# Altium PCB EXP_V121.PcbDoc (part 4 of 4)
Units mm, origin at the board's own origin, x right, y up, seen from the top; angles counter-clockwise.
Board outline 86 x 86 mm, 4 copper layers (Top Layer, Mid-Layer 1, Mid-Layer 2, Bottom Layer), stack 1.584 mm thick; 360 components, 295 nets, 1231 pads, 1192 vias.
Unrouted connection lines stored in the file: 255.
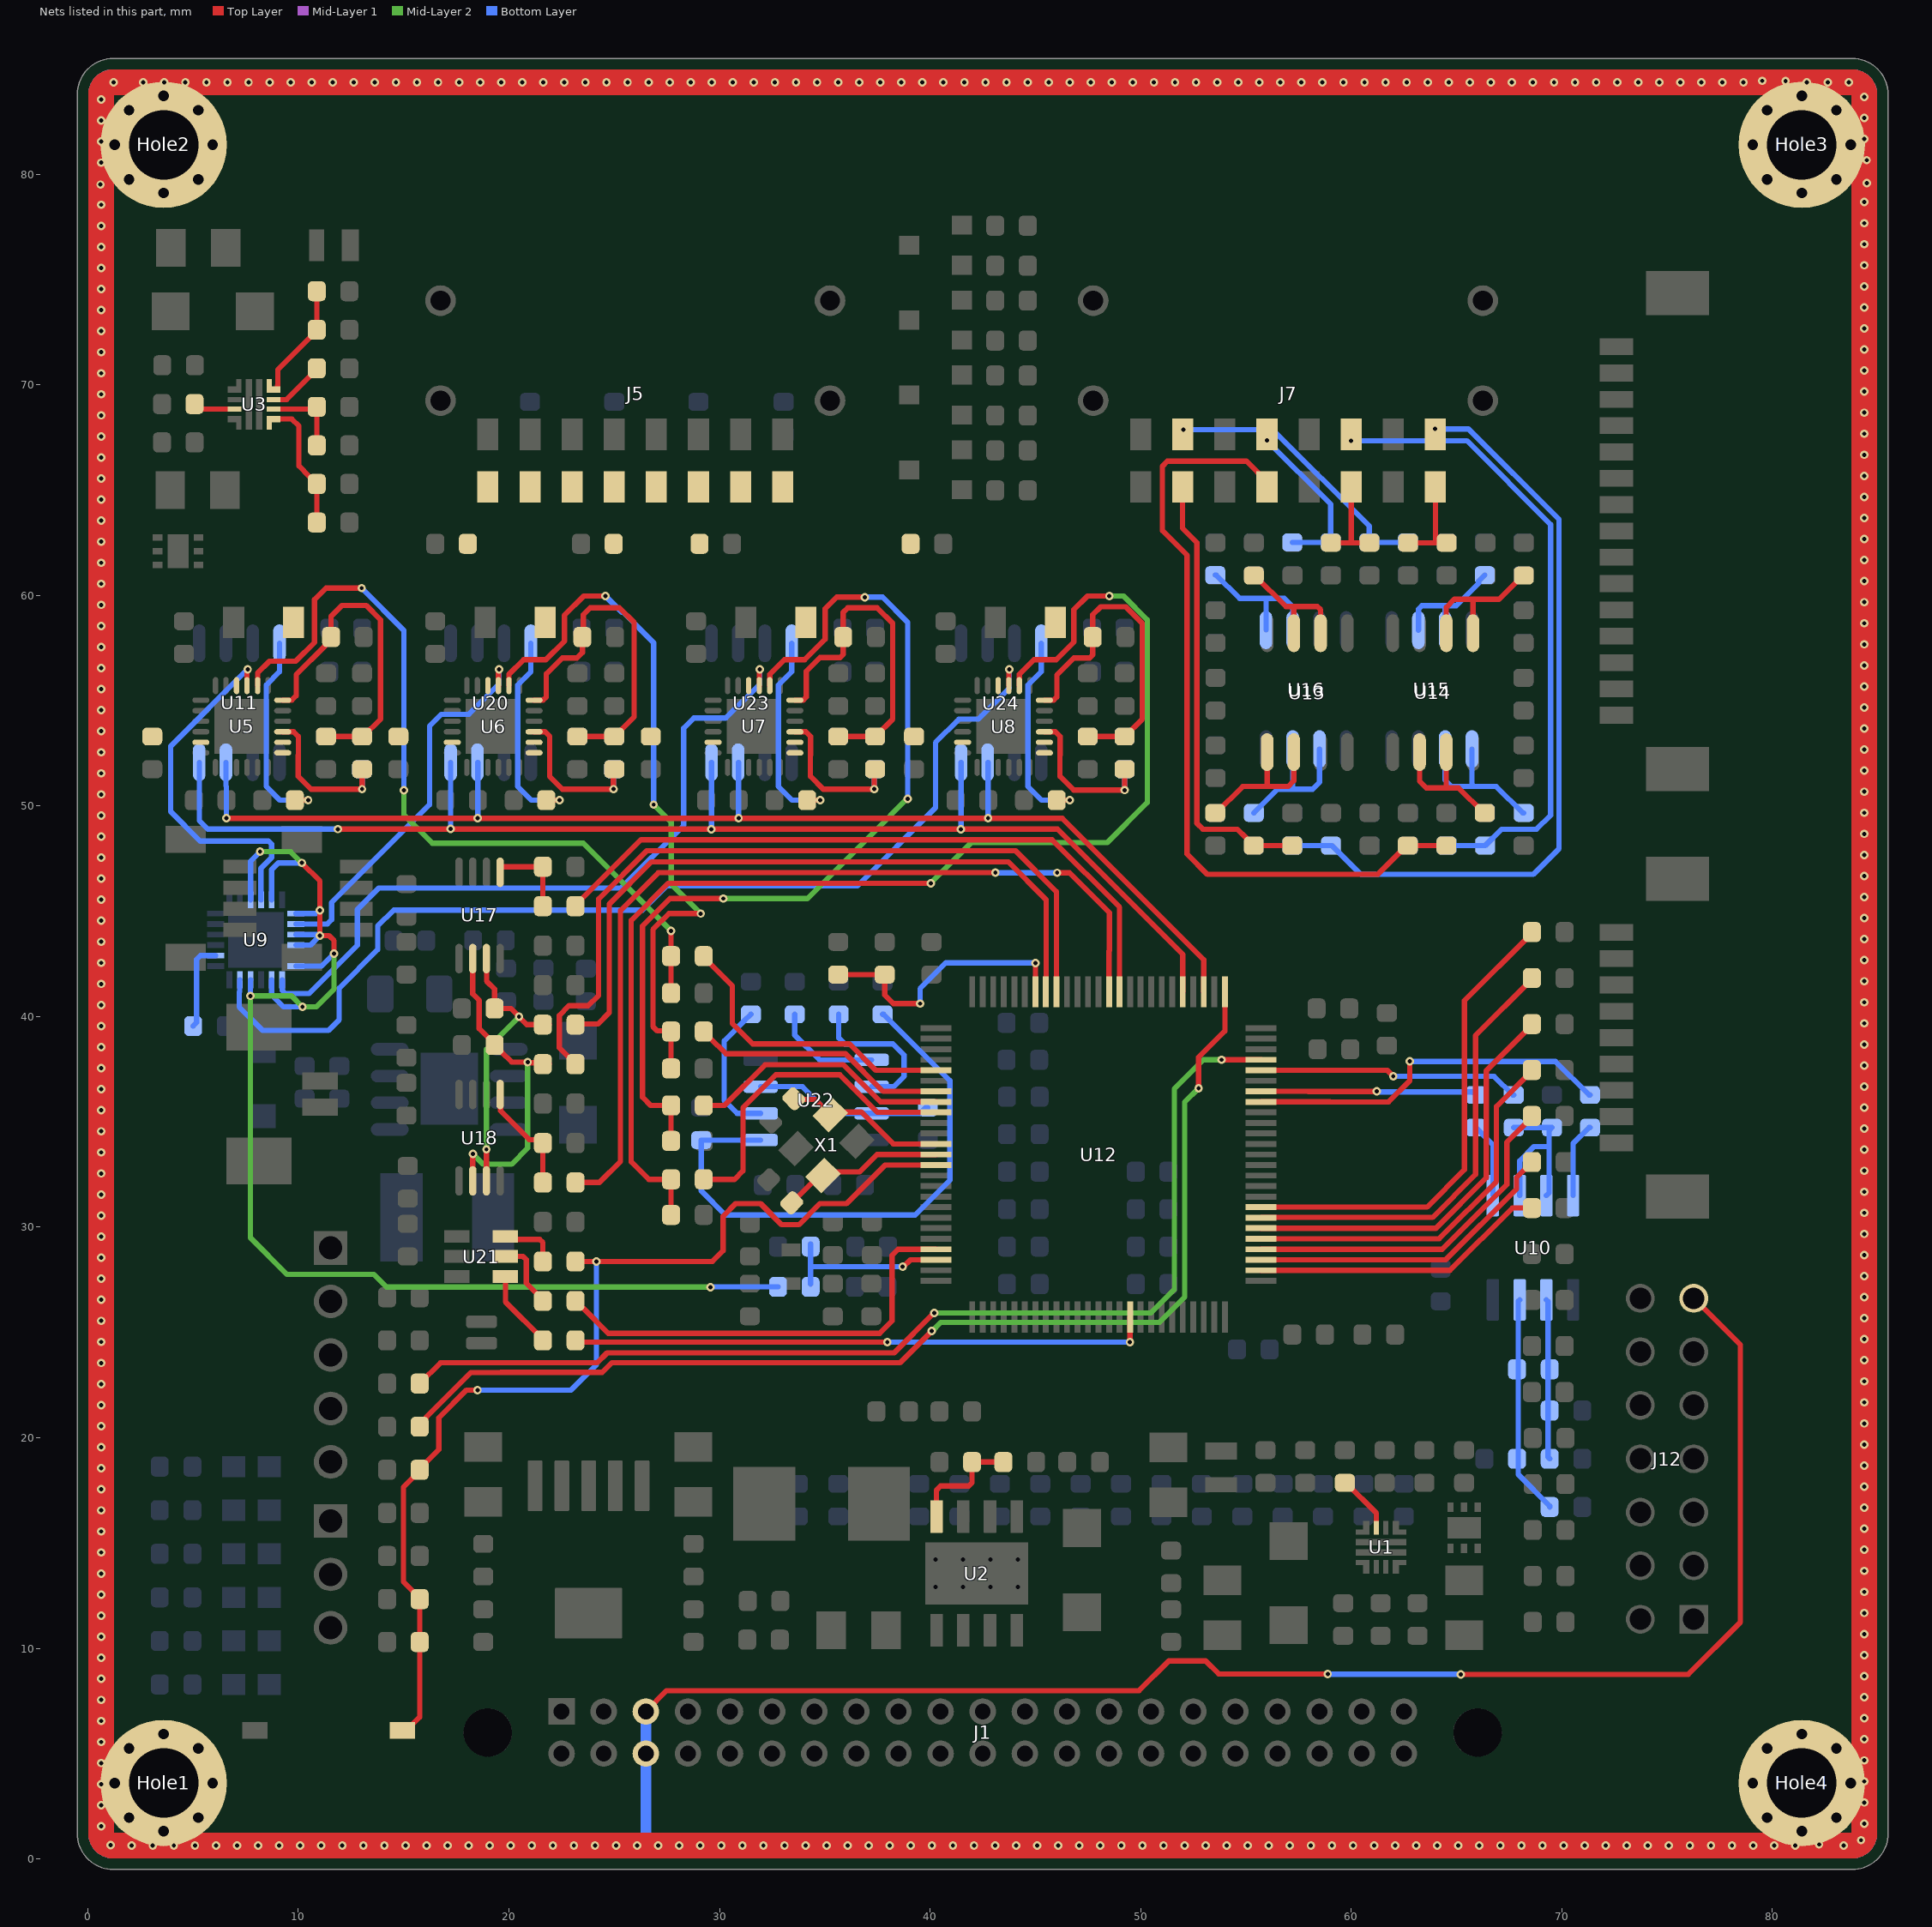
[diagram p6: the nets of this part, all layers, seen from the top]

## Via types
v1: diameter 0.4, hole 0.2, Top Layer to Bottom Layer, tented both sides, 1192 vias

## Nets (pads, with @x,y where several pads share a name; then routed paths per layer and width w, separated by ;. In a path a pad name is that pad's centre, name@x,y a point inside that pad or via, vN(x,y) a via of type N, cw(c..) or ccw(c..) an arc to the next point about the centre after c; other vN are vias at no path point) (continued)
NetR9_2: R9.2 R11.1 U2.4 | length 5.6
  Top Layer w0.254: U2.4@40.307,16.258 40.3,16.265 40.3,17.509 40.499,17.707 41.84,17.707 41.988,17.856 R11.1@41.988,18.836 ; R11.1@41.998,18.846 R9.2@43.483,18.846
NetR12_2: R12.2 R18.1 U3.2 | length 3.9
  Top Layer w0.254: U3.2@8.817,68.852 8.819,68.854 10.772,68.854 R12.2@10.873,68.954 R18.1@10.873,67.124
NetR13_2: R13.2 R17.1 U3.1 | length 6.3
  Top Layer w0.254: U3.1@8.817,68.376 9.693,68.376 10.024,68.046 10.024,66.142 10.525,65.641 10.528,65.641 10.873,65.297 R13.2@10.873,65.293 R17.1@10.873,63.463
NetR14_2: R14.2 R15.1 U3.4 | length 5.6
  Top Layer w0.254: U3.4@8.82,69.776 8.995,69.776 9.018,69.799 9.018,69.974 9.021,69.978 9.021,70.714 10.873,72.565 R14.2@10.873,72.615 R15.1@10.873,74.445
NetR19_1: R19.1 U3.9 | length 2
  Top Layer w0.254: R19.1@5.07,69.087 5.306,68.852 U3.9@6.97,68.852
NetR25_2: R25.2 R29.1 U5.8 | length 37.9
  Top Layer w0.254: U5.8@8.062,55.718 8.062,56.312 8.625,56.875 9.875,56.875 10.77,57.77 10.77,59.804 11.312,60.347 v1(13.005,60.347) ; R29.1@27.7,41.116 R25.2@27.7,42.87 v1(27.7,44.067)
  Mid-Layer 2 w0.254: v1(15.011,50.749) 15.011,49.581 16.358,48.235 23.533,48.235 v1(27.7,44.067)
  Bottom Layer w0.254: v1(13.005,60.347) 15.011,58.34 v1(15.011,50.749)
NetR26_2: R26.2 R30.1 U6.8 | length 34.3
  Top Layer w0.254: U6.8@20,55.718 20,56.25 20.695,56.945 21.75,56.945 22.637,57.832 22.637,59.056 23.552,59.971 v1(24.582,59.971) ; R30.1@27.7,37.536 R26.2@27.7,39.291 27.668,39.323 27.043,39.323 26.839,39.526 26.839,44.13 27.599,44.89 v1(29.108,44.89)
  Mid-Layer 2 w0.254: v1(26.873,50.063) 27.711,49.225 27.711,46.287 v1(29.108,44.89)
  Bottom Layer w0.254: v1(24.582,59.971) 25.354,59.199 25.427,59.199 26.873,57.752 v1(26.873,50.063)
NetR38_2: R38.2 R46.1 U12.94 | length 13.1
  Top Layer w0.254: R46.1@35.636,41.995 R38.2@37.847,41.995 37.847,41.02 38.252,40.615 v1(39.522,40.615) ; U12.94@45,41.172 v1(45,42.546)
  Bottom Layer w0.254: v1(39.522,40.615) 39.522,41.322 40.746,42.546 v1(45,42.546)
NetR66_1: R66.1 U13.1 U13.2 | length 7.4
  Top Layer w0.254: R66.1@53.542,49.67 53.592,49.67 54.849,50.927 55.987,50.927 ; U13.1@56.007,52.556 56.007,50.947 55.987,50.927 ; U13.2@57.277,52.556 57.277,51.197 57.007,50.927 55.987,50.927
NetR67_1: R67.1 U13.6 U13.7 | length 6.2
  Top Layer w0.254: R67.1@55.374,60.947 55.424,60.947 56.899,59.472 58.398,59.472 58.547,59.323 U13.6@58.547,58.206 ; U13.7@57.277,58.206 57.277,59.471
NetR72_1: R72.1 U14.6 U14.7 | length 6.8
  Top Layer w0.254: U14.6@63.246,52.557 63.246,51.181 63.564,50.863 64.516,50.863 65.102,50.863 66.294,49.67 R72.1@66.344,49.67 ; 64.516,50.863 U14.7@64.516,52.557
NetR73_1: R73.1 U14.1 U14.2 | length 7.1
  Top Layer w0.254: U14.2@64.516,58.207 64.516,59.436 64.897,59.817 65.786,59.817 ; U14.1@65.786,58.207 65.786,59.817 ; R73.1@68.198,60.947 68.148,60.947 67.018,59.817 65.786,59.817
NetR78_1: R78.1 U15.6 U15.7 | length 6
  Bottom Layer w0.254: U15.6@63.193,58.353 63.2,58.36 63.2,59.351 63.357,59.508 64.463,59.508 ; U15.7@64.463,58.353 64.463,59.508 ; R78.1@66.345,60.967 66.341,60.967 66.049,60.675 66.049,60.57 65.089,59.611 64.987,59.508 64.463,59.508
NetR80_1: R80.1 U15.1 U15.2 | length 7.7
  Bottom Layer w0.254: U15.2@64.463,52.703 64.463,51.234 64.77,50.927 65.831,50.927 ; U15.1@65.733,52.703 65.733,51.024 65.831,50.927 ; R80.1@68.198,49.67 68.148,49.67 66.891,50.927 65.831,50.927
NetR84_1: R84.1 U16.1 U16.2 | length 6.9
  Bottom Layer w0.254: R84.1@53.542,60.967 53.592,60.967 54.684,59.875 ; 54.702,59.857 55.961,59.857 56.828,59.857 57.22,59.465 U16.2@57.22,58.358 ; U16.1@55.961,58.36 55.961,59.832
NetR85_1: R85.1 U16.6 U16.7 | length 7.2
  Bottom Layer w0.254: R85.1@55.374,49.67 55.378,49.67 56.508,50.8 57.21,50.8 ; U16.7@57.224,52.703 57.224,50.814 57.21,50.8 ; U16.6@58.494,52.703 58.494,51.128 58.166,50.8 57.21,50.8
NetR90_2: R90.2 R95.2 U17.3 U18.3 | length 13.9
  Top Layer w0.254: U18.3@18.931,32.2 v1(18.931,33.693) ; U17.3@18.939,42.744 18.939,41.686 19.317,41.308 R90.2@19.317,40.386 20.089,40.386 20.477,39.998 v1(20.477,39.989) 20.848,39.618 R95.2@21.913,39.618
  Mid-Layer 2 w0.254: v1(18.931,33.693) 18.931,38.443 v1(20.477,39.989)
NetR91_2: R91.2 R94.2 U17.2 U18.2 | length 16.2
  Top Layer w0.254: U18.2@18.281,32.2 18.281,33.47 v1(18.288,33.477) ; U17.2@18.281,42.752 18.281,41.079 18.587,40.773 18.587,39.429 19.317,38.699 19.317,38.646 19.661,38.301 19.665,38.301 20.128,37.838 v1(20.889,37.838) ; v1@20.906,37.855 20.951,37.811 21.431,37.811 21.45,37.791 21.658,37.998 R94.2@21.913,37.744
  Mid-Layer 2 w0.254: v1(18.288,33.477) 18.777,32.988 20.125,32.988 20.889,33.752 v1(20.889,37.838)
NetR96_2: R96.2 R98.1 U17.5 | length 4.1
  Top Layer w0.254: U17.5@19.581,46.852 19.581,47.072 19.625,47.116 R98.1@21.613,47.116 R96.2@21.613,45.242
NetR97_2: R97.2 R101.1 U18.5 | length 5.3
  Top Layer w0.254: U18.5@19.581,36.3 19.599,36.282 19.599,35.523 20.967,34.155 21.453,34.155 R101.1@21.613,33.995 R97.2@21.613,32.12
NetR105_1: R105.1 U21.6 | length 2.8
  Top Layer w0.254: U21.6@19.832,29.559 19.975,29.415 21.464,29.415 21.613,29.266 R105.1@21.613,28.371
NetR106_1: R106.1 U21.5 | length 3.3
  Top Layer w0.254: U21.5@19.832,28.609 19.835,28.612 20.664,28.612 20.82,28.456 20.82,27.344 21.613,26.551 R106.1@21.613,26.497
NetR107_1: R107.1 U21.4 | length 3.8
  Top Layer w0.254: U21.4@19.832,27.659 19.832,26.454 21.613,24.672 R107.1@21.613,24.622
NetR118_2: R118.2 R138.1 U7.8 | length 44.8
  Top Layer w0.254: R138.1@27.7,34.095 R118.2@27.7,35.78 26.729,35.78 26.34,36.169 26.34,44.298 27.647,45.605 v1(30.175,45.605) ; U7.8@32.387,55.718 32.387,56.25 33.082,56.945 34.048,56.945 35.021,57.918 35.021,59.374 35.562,59.916 v1(36.9,59.916)
  Mid-Layer 2 w0.254: v1(30.175,45.605) 34.175,45.605 37.293,48.723 38.914,50.344 v1(38.937,50.344)
  Bottom Layer w0.254: v1(36.9,59.916) 37.747,59.916 38.937,58.726 v1(38.937,50.344)
NetR119_2: R119.2 R145.1 U8.8 | length 60.4
  Top Layer w0.254: R145.1@27.7,30.583 R119.2@27.7,32.269 26.64,32.269 25.806,33.102 25.806,44.574 27.562,46.33 v1(40.03,46.33) ; U8.8@44.238,55.718 44.238,56.25 44.933,56.945 45.988,56.945 46.83,57.787 46.83,59.327 47.469,59.966 v1(48.514,59.966)
  Mid-Layer 2 w0.254: v1(40.03,46.33) 41.962,48.261 48.414,48.261 50.317,50.165 50.317,58.849 49.2,59.966 v1(48.514,59.966)
NetR135_2: R135.2 U1.3 | length 2.8
  Top Layer w0.254: R135.2@59.701,17.859 59.751,17.859 61.196,16.415 U1.3@61.196,15.722
NetR139_2: R139.2 R141.2 U22.1 | length 27.4
  Bottom Layer w0.254: U22.1@31.952,34.132 R139.2@29.13,34.132 29.13,31.729 30.277,30.582 39.294,30.582 40.945,32.233 40.945,36.956 37.794,40.107 R141.2@37.744,40.107
NetR140_2: R140.2 U22.3 U22.7 | length 8.6
  Bottom Layer w0.254: U22.3@31.952,36.672 33.938,36.672 35.208,35.402 U22.7@37.222,35.402 39.519,35.402 39.799,35.682 R140.2@39.896,35.682
NetR142_2: R142.2 U22.6 | length 7.3
  Bottom Layer w0.254: R142.2@35.66,40.107 35.66,38.987 35.946,38.701 38.237,38.701 38.76,38.177 38.76,37.161 38.274,36.675 37.224,36.675 U22.6@37.222,36.672
NetR143_2: R143.2 U22.5 | length 5.1
  Bottom Layer w0.254: R143.2@33.576,40.107 33.576,39.119 34.752,37.942 U22.5@37.222,37.942
NetR144_2: R144.2 U22.2 | length 6.6
  Bottom Layer w0.254: R144.2@31.492,40.107 31.488,40.107 31.197,39.815 31.197,39.812 30.226,38.841 30.226,36.013 30.836,35.402 U22.2@31.952,35.402
NetR149_2: R149.2 U3.3 | length 2.7
  Top Layer w0.254: U3.3@8.82,69.301 9.439,69.301 10.873,70.734 R149.2@10.873,70.784
NetR153_1: R153.1 U9.20 | length 4.2
  Bottom Layer w0.254: R153.1@5.004,39.55 5.169,39.715 5.169,42.715 5.348,42.895 U9.20@6.075,42.895
NetR154_2: R154.2 U9.3 U9.5 U9.7 U9.9 U9.10 U9.12 U9.14 U9.16 | length 65.5
  Top Layer w0.254: v1(10.16,47.298) 11.024,46.434 v1(11.024,45.041) v1(11.024,43.844) 11.452,43.844 11.695,43.601 v1(11.695,42.991)
  Mid-Layer 2 w0.254: v1(8.179,47.831) 9.627,47.831 v1(10.16,47.298) ; v1(11.695,42.991) 11.695,41.311 10.845,40.462 v1(10.194,40.462) 9.676,40.98 v1(7.722,40.98) 7.722,29.489 9.449,27.762 13.572,27.762 14.182,27.153 v1(29.566,27.153)
  Bottom Layer w0.254: v1(7.722,40.98) 7.724,40.983 7.724,41.74 U9.16@7.727,41.743 ; U9.3@7.727,45.547 7.727,47.379 v1(8.179,47.831) ; U9.14@8.727,41.743 8.727,41.032 9.297,40.462 v1(10.194,40.462) ; U9.5@8.727,45.547 8.727,46.979 9.045,47.298 v1(10.16,47.298) ; U9.12@9.879,42.395 11.098,42.395 v1(11.695,42.991) ; U9.10@9.879,43.395 10.575,43.395 11.009,43.829 10.998,43.829 10.933,43.895 U9.9@9.879,43.895 ; U9.7@9.879,44.895 10.838,44.895 10.984,45.041 v1(11.024,45.041) ; v1(29.566,27.153) 29.578,27.165 R154.2@32.778,27.165
NetR157_1: R157.1 U10.4 | length 3.6
  Bottom Layer w0.254: U10.4@70.54,31.5 70.54,33.974 71.294,34.729 R157.1@71.344,34.729
NetR159_1: R159.1 U10.1 | length 3.6
  Bottom Layer w0.254: R159.1@65.913,34.729 65.917,34.729 66.208,34.437 66.208,34.434 66.73,33.912 U10.1@66.73,31.5
NetR167_1: R167.1 R168.2 U10.2 U10.3 | length 8.5
  Bottom Layer w0.254: R167.1@67.723,34.729 R168.2@69.534,34.729 69.402,34.597 69.402,33.824 ; U10.2@68,31.5 68,33.151 68.673,33.824 69.402,33.824 ; U10.3@69.27,31.5 69.402,31.632 69.402,33.824
NetU5_1: U5.1 U5.2
NetU6_1: U6.1 U6.2
NetU7_1: U7.1 U7.2
NetU8_1: U8.1 U8.2
NRST: BT1.2 C149.2 R105.2 R110.2 R117.1 U12.14 | length 50.6
  Top Layer w0.254: BT1.2@14.93,6.096 15.13,6.096 15.761,6.727 C149.2@15.761,10.299 R110.2@15.761,12.335 15.761,12.385 14.992,13.154 14.992,17.659 15.761,18.428 R117.1@15.761,18.478 15.761,18.528 16.671,19.439 16.671,20.95 17.98,22.259 v1(18.505,22.259) ; R105.2@23.163,28.371 v1(24.157,28.371) 29.659,28.371 30.17,28.882 30.17,30.52 30.766,31.116 31.952,31.116 32.95,30.117 33.766,30.117 34.761,31.113 36.024,31.113 37.862,32.95 U12.14@40.278,32.95
  Bottom Layer w0.254: v1(18.505,22.259) 22.945,22.259 24.157,23.47 v1(24.157,28.371)
NTC1-: J7.2 R68.1 R71.1 | length 21.2
  Top Layer w0.254: J7.2@51.985,65.135 51.985,63.198 52.675,62.509 52.675,49.179 52.956,48.898 54.593,48.898 55.023,48.468 55.023,48.464 55.367,48.12 55.611,48.12 R68.1@57.2,48.12
NTC2-: J7.4 R74.1 R77.1 | length 37.9
  Top Layer w0.254: J7.4@56,65.15 56,65.4 55.026,66.374 51.268,66.374 51.035,66.141 51.035,63.075 52.2,61.91 52.2,47.724 53.169,46.755 61.271,46.755 62.637,48.12 R74.1@62.687,48.12 R77.1@64.516,48.12
NTC3-: J7.6 R69.1 R70.1 | length 4.5
  Top Layer w0.254: R70.1@59.038,62.497 59.954,62.497 ; J7.6@60,65.15 60,62.543 59.954,62.497 ; R69.1@60.87,62.497 59.954,62.497
NTC4-: J7.8 R75.1 R76.1 | length 4
  Top Layer w0.254: R76.1@62.702,62.497 64.012,62.497 64,62.509 J7.8@64,65.15
NTC5-: J7.10 R79.1 R82.1 | length 13.3
  Bottom Layer w0.254: v1@52.045,67.869 56.28,67.869 60.858,63.292 R79.1@60.858,62.517 R82.1@62.687,62.517
  other v1: 52.036,67.879
NTC6-: J7.12 R86.1 R88.1 | length 7.9
  Bottom Layer w0.254: v1(55.994,67.359) 59.022,64.331 R88.1@59.022,62.524 ; R86.1@57.2,62.517 R88.1@59.029,62.517
NTC7-: J7.14 R81.1 R83.1 | length 30.5
  Bottom Layer w0.254: v1(59.996,67.345) 65.493,67.345 69.469,63.37 69.469,49.557 68.807,48.895 67.141,48.895 R83.1@66.366,48.12 R81.1@64.534,48.12
NTC8-: J7.16 R87.1 R89.1 | length 37
  Bottom Layer w0.254: R89.1@57.206,48.12 59.086,48.12 60.451,46.755 68.65,46.755 69.873,47.978 69.873,63.604 65.572,67.905 v1(63.991,67.905)
OSC0: C150.1 U12.12 X1.3 | length 7.7
  Top Layer w0.254: C150.1@33.529,36.097 33.564,36.062 34.549,36.062 X1.3@35.26,35.351 ; X1.3@35.295,35.245 35.752,35.245 35.97,35.462 36.739,35.462 38.252,33.95 U12.12@40.278,33.95
OSC1: C151.2 U12.13 X1.1 | length 7.8
  Top Layer w0.254: C151.2@33.43,31.154 34.834,32.558 34.871,32.558 34.942,32.628 36.659,32.628 37.48,33.45 U12.13@40.278,33.45
PHOTO_ADC_CONV: R133.2 U12.57 | length 21.5
  Top Layer w0.254: U12.57@55.722,30.45 55.734,30.463 63.864,30.463 65.908,32.507 65.908,39.103 68.585,41.78 R133.2@68.585,41.83
PHOTO_ADC_CS: R132.2 U12.56 | length 19.9
  Top Layer w0.254: U12.56@55.722,29.95 64.024,29.95 66.418,32.343 66.418,37.428 68.585,39.595 R132.2@68.585,39.645
PHOTO_ADC_EOC: R134.2 U12.58 | length 23
  Top Layer w0.254: U12.58@55.722,30.95 63.6,30.95 65.38,32.729 65.38,40.759 68.585,43.964 R134.2@68.585,44.014
PHOTO_PD_CS: R131.2 U12.55 | length 18.3
  Top Layer w0.254: U12.55@55.722,29.45 64.178,29.45 66.899,32.172 66.899,35.726 68.585,37.411 R131.2@68.585,37.461
PHOTO_SPI2_MISO: R129.2 U12.53 | length 15.1
  Top Layer w0.254: U12.53@55.722,28.45 64.485,28.45 67.855,31.819 67.855,32.363 68.237,32.745 68.24,32.745 68.585,33.089 R129.2@68.585,33.093
PHOTO_SPI2_MOSI: R130.2 U12.54 | length 16.7
  Top Layer w0.254: U12.54@55.722,28.95 64.318,28.95 67.392,32.024 67.392,34.034 68.585,35.227 R130.2@68.585,35.277
PHOTO_SPI2_SCK: R128.2 U12.52 | length 14.1
  Top Layer w0.254: U12.52@55.722,27.95 64.692,27.95 67.65,30.908 R128.2@68.585,30.908
PROTECT_EMI: Hole1.1 Hole2.1 Hole3.1 Hole4.1 J1.3 J1.24 J12.13 | length 1412.7
  Top Layer w0.254: J1.3@26.5,7 27.487,7.987 49.926,7.987 51.337,9.398 53.089,9.398 53.703,8.784 58.879,8.784 v1(58.884,8.779) ; v1(65.209,8.763) 76.007,8.763 78.486,11.242 78.486,24.404 J12.13@76.27,26.62
  Top Layer w1.23: 0.635,1.2 ccw(c1.2,1.2) v1@1.199,0.635 ; 0.635,1.202 0.635,83.8 ; 0.635,83.801 cw(c1.2,83.8) v1@1.2,84.365 ; v1@1.2,0.635 14.086,0.635 15.086,0.635 20.086,0.635 23.086,0.635 37.086,0.635 42.086,0.635 43.086,0.635 51.086,0.635 56.086,0.635 62.086,0.635 69.086,0.635 70.086,0.635 v1(83.388,0.635) 83.798,0.635 ; v1@1.202,84.365 v1@83.8,84.365 ; 83.8,0.635 ccw(c83.8,1.2) 84.365,1.198 ; v1@83.802,84.365 cw(c83.8,83.8) v1@84.365,83.8 ; 84.365,1.2 v1@84.365,83.797
  Mid-Layer 1 w1.23: 0.635,1.2 ccw(c1.2,1.2) v1@1.199,0.635 ; 0.635,1.202 0.635,83.8 ; 0.635,83.801 cw(c1.2,83.8) v1@1.2,84.365 ; v1@1.2,0.635 14.086,0.635 15.086,0.635 21.086,0.635 22.086,0.635 26.086,0.635 42.086,0.635 43.086,0.635 52.086,0.635 61.086,0.635 63.086,0.635 69.086,0.635 70.086,0.635 v1(83.388,0.635) 83.798,0.635 ; v1@1.202,84.365 v1@83.8,84.365 ; 83.8,0.635 ccw(c83.8,1.2) 84.365,1.198 ; v1@83.802,84.365 cw(c83.8,83.8) v1@84.365,83.8 ; 84.365,1.2 v1@84.365,83.797
  Mid-Layer 2 w1.23: 0.636,1.2 ccw(c1.201,1.2) v1@1.199,0.635 ; 0.636,1.203 0.636,83.8 ; 0.636,83.801 cw(c1.201,83.8) v1@1.201,84.365 ; v1@1.201,0.635 7.086,0.635 14.086,0.635 15.086,0.635 19.086,0.635 28.086,0.635 33.086,0.635 42.086,0.635 43.086,0.635 58.086,0.635 69.086,0.635 70.086,0.635 80.086,0.635 83.798,0.635 ; v1@1.202,84.365 v1@83.801,84.365 ; 83.801,0.635 ccw(c83.801,1.2) 84.366,1.199 ; v1@83.802,84.365 cw(c83.801,83.8) v1@84.366,83.8 ; 84.366,1.2 v1@84.366,83.797
  Bottom Layer w0.254: v1(58.884,8.779) 58.892,8.771 65.201,8.771 v1(65.209,8.763)
  Bottom Layer w0.508: 26.5,0.635 J1.24@26.5,5 J1.3@26.5,7
  Bottom Layer w1.23: 0.636,1.2 ccw(c1.201,1.2) v1@1.199,0.635 ; 0.636,1.203 0.636,83.8 ; 0.636,83.801 cw(c1.201,83.8) v1@1.201,84.365 ; v1@1.201,0.635 6.086,0.635 14.086,0.635 15.086,0.635 20.086,0.635 26.5,0.635 36.086,0.635 42.086,0.635 43.086,0.635 48.086,0.635 55.086,0.635 62.086,0.635 69.086,0.635 70.086,0.635 75.086,0.635 83.798,0.635 ; v1@1.202,84.365 v1@83.801,84.365 ; 83.801,0.635 ccw(c83.801,1.2) 84.366,1.199 ; v1@83.802,84.365 cw(c83.801,83.8) v1@84.366,83.8 ; 84.366,1.2 v1@84.366,83.797
  other v1: 1.086,0.656 2.086,0.638 3.086,0.638 4.086,0.638 5.086,0.638 6.086,0.638 7.086,0.638 8.086,0.638 9.086,0.638 10.086,0.638 11.086,0.638 12.086,0.638 13.086,0.638 14.086,0.638 15.086,0.638 16.086,0.638 17.086,0.638 18.086,0.638 19.086,0.638 20.086,0.638 21.086,0.638 22.086,0.638 23.086,0.638 24.086,0.638 25.086,0.638 26.086,0.638 27.086,0.638 28.086,0.638 29.086,0.638 30.086,0.638 31.086,0.638 32.086,0.638 33.086,0.638 34.086,0.638 35.086,0.638 36.086,0.638 37.086,0.638 38.086,0.638 39.086,0.638 40.086,0.638 41.086,0.638 42.086,0.638 43.086,0.638 44.086,0.638 45.086,0.638 46.086,0.638 47.086,0.638 48.086,0.638 49.086,0.638 50.086,0.638 51.086,0.638 52.086,0.638 53.086,0.638 54.086,0.638 55.086,0.638 56.086,0.638 57.086,0.638 58.086,0.638 59.086,0.638 60.086,0.638 61.086,0.638 62.086,0.638 63.086,0.638 64.086,0.638 65.086,0.638 66.086,0.638 67.086,0.638 68.086,0.638 69.086,0.638 70.086,0.638 71.086,0.638 72.086,0.638 73.086,0.638 74.086,0.638 75.086,0.638 76.086,0.638 77.086,0.638 78.086,0.638 79.086,0.638 80.086,0.638 81.086,0.638 82.22,0.686 84.213,0.888 0.639,1.55 84.362,1.678 0.639,2.55 84.362,2.678 0.639,3.55 84.362,3.678 0.639,4.55 84.362,4.678 0.639,5.55 84.362,5.678 0.639,6.55 84.362,6.678 0.639,7.55 84.362,7.678 0.639,8.55 84.362,8.678 0.639,9.55 84.362,9.678 0.639,10.55 84.362,10.678 0.639,11.55 84.362,11.678 0.639,12.55 84.362,12.678 0.639,13.55 84.362,13.678 0.639,14.55 84.362,14.678 0.639,15.55 84.362,15.678 0.639,16.55 84.362,16.678 0.639,17.55 84.362,17.678 0.639,18.55 84.362,18.678 0.639,19.55 84.362,19.678 0.639,20.55 84.362,20.678 0.639,21.55 84.362,21.678 0.639,22.55 84.362,22.678 0.639,23.55 84.362,23.678 0.639,24.55 84.362,24.678 0.639,25.55 84.362,25.678 0.639,26.55 84.362,26.678 0.639,27.55 84.362,27.678 0.639,28.55 84.362,28.678 0.639,29.55 84.362,29.678 0.639,30.55 84.362,30.678 0.639,31.55 84.362,31.678 0.639,32.55 84.362,32.678 0.639,33.55 84.362,33.678 0.639,34.55 84.362,34.678 0.639,35.55 84.362,35.678 0.639,36.55 84.362,36.678 0.639,37.55 84.362,37.678 0.639,38.55 84.362,38.678 0.639,39.55 84.362,39.678 0.639,40.55 84.362,40.678 0.639,41.55 84.362,41.678 0.639,42.55 84.362,42.678 0.639,43.55 84.362,43.678 0.639,44.55 84.362,44.678 0.639,45.55 84.362,45.678 0.639,46.55 84.362,46.678 0.639,47.55 84.362,47.678 0.639,48.55 84.362,48.678 0.639,49.55 84.362,49.678 0.639,50.55 84.362,50.678 0.639,51.55 84.362,51.678 0.639,52.55 84.362,52.678 0.639,53.55 84.362,53.678 0.639,54.55 84.362,54.678 0.639,55.55 84.362,55.678 0.639,56.55 84.362,56.678 0.639,57.55 84.362,57.678 0.639,58.55 84.362,58.678 0.639,59.55 84.362,59.678 0.639,60.55 84.362,60.678 0.639,61.55 84.362,61.678 0.639,62.55 84.362,62.678 0.639,63.55 84.362,63.678 0.639,64.55 84.362,64.678 0.639,65.55 84.362,65.678 0.639,66.55 84.362,66.678 0.639,67.55 84.362,67.678 0.639,68.55 84.362,68.678 0.639,69.55 84.362,69.678 0.639,70.55 84.362,70.678 0.639,71.55 84.362,71.678 0.639,72.55 84.362,72.678 0.639,73.55 84.362,73.678 0.639,74.55 84.362,74.678 0.639,75.55 84.362,75.678 0.639,76.55 84.362,76.678 0.639,77.55 84.362,77.678 0.639,78.55 84.362,78.678 0.602,79.512 84.482,79.583 0.639,80.55 84.48,80.67 0.639,81.55 84.362,81.678 0.639,82.55 84.362,82.678 0.639,83.55 84.362,83.678 1.223,84.361 2.632,84.361 3.632,84.361 4.632,84.361 5.632,84.361 6.632,84.361 7.632,84.361 8.632,84.361 9.632,84.361 10.632,84.361 11.632,84.361 12.632,84.361 13.632,84.361 14.632,84.361 15.632,84.361 16.632,84.361 17.632,84.361 18.632,84.361 19.632,84.361 20.632,84.361 21.632,84.361 22.632,84.361 23.632,84.361 24.632,84.361 25.632,84.361 26.632,84.361 27.632,84.361 28.632,84.361 29.632,84.361 30.632,84.361 31.632,84.361 32.632,84.361 33.632,84.361 34.632,84.361 35.632,84.361 36.632,84.361 37.632,84.361 38.632,84.361 39.632,84.361 40.632,84.361 41.632,84.361 42.632,84.361 43.632,84.361 44.632,84.361 45.632,84.361 46.632,84.361 47.632,84.361 48.632,84.361 49.632,84.361 50.632,84.361 51.632,84.361 52.632,84.361 53.632,84.361 54.632,84.361 55.632,84.361 56.632,84.361 57.632,84.361 58.632,84.361 59.632,84.361 60.632,84.361 61.632,84.361 62.632,84.361 63.632,84.361 64.632,84.361 65.632,84.361 66.632,84.361 67.632,84.361 68.632,84.361 69.632,84.361 70.632,84.361 71.632,84.361 72.632,84.361 73.632,84.361 74.632,84.361 75.632,84.361 76.632,84.361 77.632,84.361 78.632,84.361 81.632,84.361 82.632,84.361 83.632,84.361 80.628,84.422 79.522,84.437
RS485_A: R156.2 R158.1 R161.2 U10.6 | length 7.6
  Bottom Layer w0.254: U10.6@69.27,26.55 69.349,26.471 69.349,19.079 R161.2@69.427,19
RS485_B: R158.2 R160.1 R162.2 U10.7 | length 10.5
  Bottom Layer w0.254: U10.7@68,26.55 67.939,26.489 67.939,23.25 67.939,18.249 69.427,16.76 R162.2@69.427,16.71
RS485_USART1_DE: R167.2 U12.71 | length 12.6
  Top Layer w0.254: U12.71@55.722,37.45 61.709,37.45 v1@62.046,37.113
  Bottom Layer w0.254: v1(61.998,37.161) 66.792,37.161 67.673,36.279 R167.2@67.723,36.279
RS485_USART1_RX: R159.2 U12.69 | length 10.3
  Top Layer w0.254: U12.69@55.722,36.45 57.958,36.45 57.968,36.44 61.205,36.44 v1(61.215,36.45)
  Bottom Layer w0.254: v1(61.215,36.45) 61.243,36.422 65.77,36.422 R159.2@65.913,36.279
RS485_USART1_TX: R157.2 U12.68 | length 17.6
  Top Layer w0.254: U12.68@55.722,35.95 58.988,35.95 58.993,35.945 61.771,35.945 62.781,36.955 v1(62.781,37.871)
  Bottom Layer w0.254: v1(62.781,37.871) 69.702,37.871 71.294,36.279 R157.2@71.344,36.279
SENSOR1_EN: R96.1 U12.86 | length 32.5
  Top Layer w0.254: R96.1@23.163,45.242 23.163,45.292 26.266,48.395 45.795,48.395 49,45.19 49,44.343 48.995,44.338 48.995,43.92 49,43.915 U12.86@49,41.172
SENSOR2_EN: R97.1 U12.87 | length 43
  Top Layer w0.254: R97.1@23.163,32.12 24.297,32.12 25.298,33.122 25.298,45.034 27.099,46.835 v1(43.101,46.835) ; v1(46.033,46.83) 46.628,46.83 48.52,44.938 48.52,43.129 48.5,43.109 U12.87@48.5,41.172
  Bottom Layer w0.254: v1(43.101,46.835) 43.106,46.83 v1(46.033,46.83)
SENSOR_I2C1_SCL: R94.1 U12.92 | length 37.7
  Top Layer w0.254: R94.1@23.163,37.744 23.163,37.747 22.819,38.092 22.815,38.092 22.391,38.516 22.391,40.053 22.848,40.51 23.761,40.51 24.257,41.006 24.257,45.593 26.539,47.875 44.061,47.875 46,45.936 U12.92@46,41.172
SENSOR_I2C1_SDA: R95.1 U12.93 | length 33.7
  Top Layer w0.254: R95.1@23.163,39.618 23.189,39.644 24.226,39.644 24.765,40.183 24.765,45.339 26.776,47.35 43.716,47.35 45.513,45.554 U12.93@45.513,41.184
SWCLK: R116.1 U12.76 | length 54.2
  Top Layer w0.254: R116.1@15.761,20.526 15.761,20.623 16.059,20.921 16.059,20.961 18.197,23.099 19.614,23.099 19.618,23.102 24.428,23.102 24.884,23.558 38.569,23.558 v1(40.081,25.07) ; v1(52.754,36.595) 52.754,38.071 54,39.317 U12.76@54,41.172
  Mid-Layer 2 w0.254: v1(40.081,25.07) 40.1,25.07 40.501,25.471 50.886,25.471 52.088,26.674 52.088,35.929 v1(52.754,36.595)
SWDIO: R115.1 U12.72 | length 51.9
  Top Layer w0.254: R115.1@15.761,22.574 16.745,23.559 24.189,23.559 24.662,24.031 38.298,24.031 v1(40.196,25.928) ; v1(53.848,37.95) U12.72@55.722,37.95
  Mid-Layer 2 w0.254: v1(40.196,25.928) 50.493,25.928 51.598,27.033 51.598,36.568 52.98,37.95 v1(53.848,37.95)
TEC1_CONTROL_VOLT: R33.1 U11.8 | length 9.9
  Top Layer w0.254: R33.1@9.837,50.275 v1(10.462,50.275)
  Bottom Layer w0.254: U11.8@9.102,57.725 9.102,56.376 8.476,55.75 8.476,50.925 9.126,50.275 v1(10.462,50.275)
TEC1_VREF_2.5: C26.2 R23.1 R31.1 U5.6 | length 15.7
  Top Layer w0.254: U5.6@9.255,55.025 9.681,55.025 9.896,55.24 9.896,56.233 11.252,57.589 11.252,57.631 11.55,57.929 11.55,59.013 12.061,59.524 13.222,59.524 13.9,58.846 13.9,54.125 13.075,53.3 R31.1@13.025,53.3 R23.1@11.312,53.3
TEC2_CONTROL_VOLT: R34.1 U20.8 | length 9.9
  Top Layer w0.254: R34.1@21.775,50.275 v1(22.4,50.275)
  Bottom Layer w0.254: U20.8@21.04,57.725 21.04,56.376 20.414,55.75 20.414,50.925 21.064,50.275 v1(22.4,50.275)
TEC2_VREF_2.5: C27.2 R24.1 R32.1 U6.6 | length 16.1
  Top Layer w0.254: U6.6@21.193,55.025 21.626,55.025 21.775,55.174 21.775,56.275 22.53,57.03 23.23,57.03 23.487,57.287 C27.2@23.487,58.025 23.532,58.07 23.532,59.089 23.854,59.411 25.248,59.411 25.95,58.708 25.95,54.237 25.013,53.3 24.963,53.3 R24.1@23.25,53.3
TEC3_CONTROL_VOLT: R148.1 U23.8 | length 9.9
  Top Layer w0.254: R148.1@34.162,50.275 v1(34.787,50.275)
  Bottom Layer w0.254: U23.8@33.427,57.725 33.427,56.376 32.801,55.75 32.801,50.925 33.451,50.275 v1(34.787,50.275)
TEC3_VREF_2.5: C38.2 R56.1 R146.1 U7.6 | length 16.1
  Top Layer w0.254: U7.6@33.58,55.025 33.976,55.025 34.125,55.174 34.125,56.4 34.775,57.05 35.726,57.05 35.874,57.199 35.874,59.196 36.088,59.411 37.489,59.411 38.225,58.675 38.225,54.125 37.4,53.3 37.35,53.3 R56.1@35.637,53.3
TEC4_CONTROL_VOLT: R150.1 U24.8 | length 9.9
  Top Layer w0.254: R150.1@46.013,50.275 v1(46.638,50.275)
  Bottom Layer w0.254: U24.8@45.278,57.725 45.278,56.376 44.651,55.75 44.651,50.925 45.302,50.275 v1(46.638,50.275)
TEC4_VREF_2.5: C39.2 R57.1 R147.1 U8.6 | length 16
  Top Layer w0.254: U8.6@45.431,55.025 45.87,55.025 46.019,55.174 46.019,56.219 46.83,57.03 47.576,57.03 47.725,57.179 C39.2@47.725,58.025 47.725,59.083 48.103,59.461 49.289,59.461 50.075,58.675 50.075,54.125 49.25,53.3 49.2,53.3 R57.1@47.488,53.3
TEC_1_A: C28.2 J5.1 U5.17
TEC_1_B: C32.2 J5.2 L2.2 U5.10
TEC_1_EN: R25.1 U12.5 | length 14.4
  Top Layer w0.254: R25.1@29.25,42.87 29.25,42.82 30.603,41.467 30.603,39.677 31.576,38.704 36.173,38.704 37.427,37.45 U12.5@40.336,37.45
TEC_2_A: C29.2 J5.3 U6.17
TEC_2_B: C33.2 J5.4 L3.2 U6.10
TEC_2_EN: R26.1 U12.7 | length 12.2
  Top Layer w0.254: R26.1@29.25,39.291 29.25,39.287 29.541,38.995 29.545,38.995 30.304,38.236 35.985,38.236 37.772,36.45 U12.7@40.278,36.45
TEC_3_A: C40.2 J5.5 U7.17
TEC_3_B: C44.2 J5.6 L4.2 U7.10
TEC_3_EN: R118.1 U12.8 | length 12.6
  Top Layer w0.254: R118.1@29.25,35.78 30.228,35.78 32.159,37.711 35.885,37.711 37.646,35.95 U12.8@40.278,35.95
TEC_4_A: C41.2 J5.7 U8.17
TEC_4_B: C45.2 J5.8 L5.2 U8.10
TEC_4_EN: R119.1 U12.9 | length 15.6
  Top Layer w0.254: R119.1@29.25,32.269 30.713,32.269 31.113,32.669 31.113,35.67 32.679,37.236 35.715,37.236 37.501,35.45 U12.9@40.278,35.45
TEC_ADC: C46.2 R154.1 U12.23 | length 8
  Top Layer w0.254: v1(38.7,28.125) 38.74,28.125 39.065,28.45 U12.23@40.278,28.45
  Bottom Layer w0.254: R154.1@34.328,27.295 34.328,28.125 ; C46.2@34.328,29.205 34.328,28.25 34.328,28.125 ; v1(38.7,28.125) 34.328,28.125
TEC_SPI3_MOSI: U11.4 U12.80 U20.4 U23.4 U24.4 | length 63.4
  Top Layer w0.254: v1(11.878,48.902) 11.878,48.9 17.176,48.9 17.181,48.904 29.612,48.904 v1(29.616,48.9) ; v1@29.657,48.859 29.657,48.873 29.684,48.9 v1(41.467,48.9) 46.051,48.9 52,42.951 U12.80@52,41.172
  Bottom Layer w0.254: U11.4@5.292,52.075 5.292,49.308 5.698,48.902 v1(11.878,48.902) ; v1(17.23,48.909) U20.4@17.23,52.075 ; v1(29.616,48.9) U23.4@29.617,52.075 ; v1(41.467,48.9) U24.4@41.468,52.075
TEC_SPI3_SCK: U11.3 U12.78 U20.3 U23.3 U24.3 | length 61.4
  Top Layer w0.254: v1(6.581,49.419) 6.586,49.414 30.906,49.414 46.286,49.414 53,42.7 U12.78@53,41.172
  Bottom Layer w0.254: U11.3@6.562,52.075 6.562,50.95 6.581,50.931 v1(6.581,49.419) ; v1(18.519,49.419) U20.3@18.519,52.075 ; v1(30.906,49.419) U23.3@30.906,52.075 ; v1(42.756,49.419) U24.3@42.756,52.075
VLIM_1: R31.2 R35.1 U5.3 | length 7.9
  Top Layer w0.254: U5.3@9.255,53.525 9.775,53.525 10,53.3 10,52.423 9.995,52.418 9.995,51.405 10.6,50.8 v1(13.025,50.8) R31.2@13.025,51.75
  Bottom Layer w0.254: v1(13.025,50.8) R35.1@13.025,51.75
VLIM_2: R32.2 R36.1 U6.3 | length 7.9
  Top Layer w0.254: U6.3@21.193,53.525 21.713,53.525 21.938,53.3 21.938,52.423 21.933,52.418 21.933,51.405 22.538,50.8 v1(24.963,50.8) R32.2@24.963,51.75
  Bottom Layer w0.254: v1(24.963,50.8) 24.963,51.713 R36.1@25,51.75
VLIM_3: R146.2 R151.1 U7.3 | length 7.9
  Top Layer w0.254: U7.3@33.58,53.525 34.1,53.525 34.325,53.3 34.325,52.423 34.32,52.418 34.32,51.405 34.925,50.8 v1(37.35,50.8) R146.2@37.35,51.75
  Bottom Layer w0.254: v1(37.35,50.8) 37.35,51.713 R151.1@37.387,51.75
VLIM_4: R147.2 R152.1 U8.3 | length 8.1
  Top Layer w0.254: U8.3@45.431,53.525 45.95,53.525 46.175,53.3 46.175,52.423 46.17,52.418 46.17,51.405 46.822,50.754 v1(49.243,50.754) 49.24,50.757 49.24,51.71 R147.2@49.2,51.75
  Bottom Layer w0.254: R152.1@49.238,51.75 49.24,51.747 49.24,50.757 v1(49.243,50.754)
VTEC_ADC_1: U5.9 U9.4 | length 17.3
  Top Layer w0.254: U5.9@7.562,55.718 7.562,56.464 v1(7.59,56.492)
  Bottom Layer w0.254: v1(7.59,56.492) 3.933,52.835 3.933,49.737 5.334,48.336 8.578,48.336 8.727,48.187 8.727,47.551 8.217,47.04 8.217,45.558 U9.4@8.227,45.547
VTEC_ADC_2: U6.9 U9.8 | length 18.5
  Top Layer w0.254: U6.9@19.5,55.718 19.5,56.464 v1(19.528,56.492)
  Bottom Layer w0.254: U9.8@9.879,44.395 11.375,44.395 11.582,44.602 11.582,45.415 16.231,50.063 16.231,53.797 16.789,54.356 18.091,54.356 19.528,55.793 v1(19.528,56.492)
VTEC_ADC_3: U7.9 U9.13 | length 34.5
  Top Layer w0.254: U7.9@31.887,55.718 31.887,56.464 v1(31.915,56.492)
  Bottom Layer w0.254: U9.13@9.227,41.743 9.237,41.732 9.237,41.239 9.386,41.09 10.508,41.09 12.802,43.384 12.802,45.085 13.821,46.105 25.328,46.105 28.296,49.072 28.296,53.696 28.778,54.178 30.3,54.178 31.915,55.793 v1(31.915,56.492)
VTEC_ADC_4: U8.9 U9.17 | length 50.1
  Top Layer w0.254: U8.9@43.738,55.718 43.738,56.464 v1(43.766,56.492)
  Bottom Layer w0.254: U9.17@7.227,41.743 7.217,41.732 7.217,41.189 7.19,41.162 7.19,40.46 8.306,39.345 11.43,39.345 11.938,39.853 11.938,41.351 13.767,43.18 13.767,44.297 14.528,45.058 26.341,45.058 27.485,46.203 36.551,46.203 40.259,49.911 40.259,53.01 41.374,54.125 42.288,54.125 42.443,54.28 42.449,54.28 43.766,55.596 v1(43.766,56.492)
WD_DONE: R107.2 U12.41 | length 27.6
  Top Layer w0.254: R107.2@23.163,24.622 23.249,24.536 v1(37.968,24.536) ; v1@49.492,24.46 49.496,24.464 49.496,25.725 U12.41@49.5,25.728
  Bottom Layer w0.254: v1(37.968,24.536) v1(49.492,24.536)
WD_WAKE: R106.2 U12.22 | length 21.2
  Top Layer w0.254: R106.2@23.179,26.497 23.179,26.477 23.507,26.149 23.527,26.149 24.715,24.96 37.611,24.96 38.195,25.545 38.195,28.667 38.478,28.95 U12.22@40.278,28.95
pads on no net: J1. J5.SH1 J5.SH2 J5.SH3 J5.SH4 J7.SH1 J7.SH2 J7.SH3 J7.SH4 U2.2 U2.3 U2.5 U5.20 U5.21 U6.20 U6.21 U7.20 U7.21 U8.20 U8.21 U9.19 U12.4 U12.79 U12.95 U12.96

## Polygon pours and split planes (outlines as drawn)
5V on Bottom Layer "Bottom Layer-+5" (solid, pour order 5): 19.092,37.452 19.102,36.898 24.157,36.898 24.157,39.083 24.157,41.267 18.281,41.267 15.55,41.267 15.55,39.083 21.375,39.083 21.375,37.452
GND on Bottom Layer "GND_L04_P032" (solid, remove dead copper, pour order 32): 1.2,-0.5 cw(c1.2,1.2) -0.5,1.2 -0.5,83.8 cw(c1.2,83.8) 1.197,85.5 1.202,85.5 83.799,85.5 83.804,85.5 cw(c83.8,83.8) 85.5,83.803 85.5,83.798 85.5,1.2 cw(c83.8,1.2) 83.8,-0.5
IR_LED_P on Bottom Layer "Bottom Layer-IR_LED_P" (solid, pour order 3): 11.944,36.881 14.835,36.881 14.835,37.471 14.509,37.471 14.509,39.005 15.05,39.005 15.05,41.267 12.357,41.267 12.357,38.306 12.121,38.07 11.944,38.071
GND on Mid-Layer 2 "GND_L03_P031" (solid, remove dead copper, pour order 31): 1.2,-0.5 cw(c1.2,1.2) -0.5,1.2 -0.5,83.8 cw(c1.2,83.8) 1.197,85.5 1.202,85.5 83.799,85.5 83.804,85.5 cw(c83.8,83.8) 85.5,83.803 85.5,83.798 85.5,1.2 cw(c83.8,1.2) 83.8,-0.5
GND_CAM on Mid-Layer 2 "GND_CAM_L03_P028" (solid, pour order 28): 16.141,8.128 75.057,8.128 78.74,11.811 78.74,48.514 76.835,50.419 70.282,50.419 70.282,77.851 84.362,77.851 84.211,77.7 84.211,0.809 16.141,0.809
5V on Mid-Layer 2 "5V_L03_P027" (solid, pour order 27): 11.053,78.562 15.045,78.562 15.045,57.15 4,57.15 4,15.939 4.935,15.004 24.892,15.004 24.892,18.932 25.137,19.177 27.355,19.177 27.559,18.973 27.559,10.285 26.672,9.398 0.889,9.398 0.889,65.151 1.016,65.278 11.045,65.278
5V_TEMP on Mid-Layer 2 "Mid-Layer 2-5V_TEMP" (solid, pour order 25): 4.115,54.356 50.165,54.356 50.165,57.5 18.288,57.5 18.288,66.929 33.528,66.929 33.528,68.416 18.288,68.416 18.288,81.05 9,81.05 5.858,77.908 5.858,72.565 10.867,72.565 10.867,77.574 11.518,78.225 15.24,78.225 15.24,57.5 4.115,57.5
12V_EXP on Mid-Layer 2 "Mid-Layer 2-12V_EXP" (solid, pour order 26): 66.249,8.361 66.371,8.283 66.371,8.361 74.943,8.361 74.943,14.465 72.344,17.064 72.344,33.401 73.537,33.401 73.537,34.486 71.02,34.486 71.02,10.409 66.371,10.409 66.371,19.708 66.267,19.812 64.262,19.812 64.169,19.719 64.169,10.414 59.271,10.414 59.271,17.952 56.979,20.244 52.959,20.244 52.959,18.796 55.548,18.796 57.32,17.024 57.32,10.414 57.32,5.807 64.169,5.807 64.169,8.361
GND on Mid-Layer 1 "GND_L02_P029" (solid, remove dead copper, pour order 29): 1.2,-0.5 cw(c1.2,1.2) -0.5,1.2 -0.5,83.8 cw(c1.2,83.8) 1.197,85.5 1.202,85.5 83.799,85.5 83.804,85.5 cw(c83.8,83.8) 85.5,83.803 85.5,83.798 85.5,1.2 cw(c83.8,1.2) 83.8,-0.5
GND_CAM on Mid-Layer 1 "GND_CAM_L02_P019" (solid, pour order 19): 16.086,8.128 45.63,8.128 45.63,3.988 71.145,3.988 78.74,11.582 78.74,48.514 76.835,50.419 70.282,50.419 70.282,77.851 84.362,77.851 84.211,77.7 84.211,0.809 16.086,0.809
GND on Top Layer "GND_L01_P030" (solid, remove dead copper, pour order 30): 1.2,-0.5 cw(c1.2,1.2) -0.5,1.2 -0.5,83.8 cw(c1.2,83.8) 1.197,85.5 1.202,85.5 83.799,85.5 83.804,85.5 cw(c83.8,83.8) 85.5,83.803 85.5,83.798 85.5,1.2 cw(c83.8,1.2) 83.8,-0.5

## Keep-outs
Keep-Out Layer:
  lines w0.444: 1.197,85.5 ccw(c1.2,83.8) -0.5,83.8 -0.5,1.2 ccw(c1.2,1.2) 1.2,-0.5 83.8,-0.5 ccw(c83.8,1.2) 85.5,1.2 85.5,83.798 ; 1.202,85.5 83.799,85.5 ; 83.804,85.5 cw(c83.8,83.8) 85.5,83.803

## Other copper
Top Layer:
  rectangle net NetU8_1: 45.116,52.527 45.726,53.01
  rectangle net NetU7_1: 33.265,52.527 33.875,53.01
  rectangle net NetU6_1: 20.879,52.527 21.488,53.01
  rectangle net NetU5_1: 8.941,52.527 9.55,53.01
  rectangle net 12V_EXP: 53.062,18.846 54.596,20.256
  rectangle net 5V_CAM: 71.12,71.404 73.4,72.215
  rectangle net GND_CAM: 71.12,70.154 73.4,70.965
  rectangle net GND_CAM: 71.12,53.904 73.4,54.715
  region net TEC_2_B: 19.127,56.877 19.5,57.25 21.5,57.25 22.211,57.961 22.211,60.349 25.496,60.349 25.496,65.9 24.5,65.9 24.5,61.237 21.213,61.237 21.213,58.213 20.75,57.75 19.484,57.75 18.874,57.14 18.874,55.654 19.127,55.653
  region net TEC_1_B: 7.189,56.939 7.5,57.25 9.557,57.25 10.273,57.966 10.273,60.725 18.65,60.725 18.65,63.03 21.5,63.03 21.5,65.9 20.5,65.9 20.5,63.893 17.575,63.893 17.575,61.569 9.272,61.569 9.272,58.272 8.773,57.773 7.523,57.773 6.937,57.187 6.937,55.658 7.189,55.656
  region net TEC_3_A: 26.5,52.898 29.694,52.898 29.694,53.152 28.623,53.152 28.175,53.6 27.5,54.275 27.5,65.9 26.5,65.9 26.5,54 26.263,53.763 26.263,53.3 26.5,53.3
  region net NetL5_1: 43.103,58.718 43.103,59.468 42.068,59.468 41.438,58.837 41.438,56.621 40.523,55.706 40.523,54.581 40.704,54.399 41.542,54.399 41.542,54.522 41.544,54.525 41.537,54.533 41.537,54.65 41.522,54.65 41.519,54.652 40.877,54.652 40.821,54.708 40.821,55.431 42.144,56.755 42.144,57.607 42.506,57.969 43.103,57.969
  region net NetL4_1: 31.252,58.718 31.252,59.468 30.218,59.468 29.587,58.837 29.587,56.621 28.672,55.706 28.672,54.581 28.853,54.399 29.691,54.399 29.691,54.522 29.694,54.525 29.686,54.533 29.686,54.65 29.671,54.65 29.669,54.652 29.026,54.652 28.97,54.708 28.97,55.431 30.294,56.755 30.294,57.607 30.655,57.969 31.252,57.969
  region net NetL3_1: 18.865,58.718 18.865,59.468 17.831,59.468 17.2,58.837 17.2,56.621 16.285,55.706 16.285,54.581 16.467,54.399 17.304,54.399 17.304,54.522 17.307,54.525 17.299,54.533 17.299,54.65 17.284,54.65 17.282,54.652 16.639,54.652 16.583,54.708 16.583,55.431 17.907,56.755 17.907,57.607 18.268,57.969 18.865,57.969
  region net NetL2_1: 6.927,58.718 6.927,59.468 5.893,59.468 5.262,58.837 5.262,56.621 4.347,55.706 4.347,54.581 4.529,54.399 5.366,54.399 5.366,54.522 5.369,54.525 5.361,54.533 5.361,54.65 5.347,54.65 5.344,54.652 4.702,54.652 4.646,54.708 4.646,55.431 5.969,56.755 5.969,57.607 6.331,57.969 6.927,57.969
  region net TEC_4_B: 43.365,56.892 43.722,57.25 45.724,57.25 46.449,57.975 46.449,60.401 45.752,61.098 40.302,61.098 39.675,61.725 39.675,62.938 36.713,65.9 32.5,65.9 32.5,64.403 35.222,64.403 38.527,61.098 39.475,60.15 45.125,60.15 45.45,59.825 45.45,58.2 45,57.75 43.639,57.75 43.112,57.223 43.112,55.654 43.365,55.653
  region net TEC_3_B: 31.514,57.014 31.761,57.261 33.883,57.261 34.598,57.976 34.598,61.35 29.5,61.35 29.5,65.9 28.5,65.9 28.5,60.35 33.6,60.35 33.6,58.206 33.144,57.75 31.75,57.75 31.261,57.261 31.261,55.654 31.514,55.653
  region net TEC_1_A: 2.78,52.898 5.369,52.898 5.369,53.152 4.298,53.152 3.85,53.6 3.54,53.91 3.54,59.95 8.05,59.95 8.05,61.8 15.725,61.8 15.725,64.4 19.5,64.4 19.5,65.9 14.6,65.9 14.6,62.7 7.075,62.7 7.075,60.75 2.59,60.75 2.59,52.9 2.78,52.9
  region net TEC_2_A: 14.5,52.898 17.307,52.898 17.307,53.152 16.236,53.152 15.788,53.6 15.223,54.165 15.223,59.65 20,59.65 20,62.05 22.55,62.05 22.55,63.575 23.5,63.575 23.5,65.9 22.5,65.9 22.5,64.15 21.775,64.15 21.775,62.775 19.125,62.775 19.125,60.473 14.275,60.473 14.275,53.3 14.5,53.3
  region net TEC_4_A: 30.5,63.125 34.225,63.125 38.6,58.75 38.6,55.4 38.765,55.235 38.765,53.3 39.077,53.3 38.955,53.073 38.955,52.898 41.544,52.898 41.544,53.152 40.473,53.152 40.025,53.6 39.711,53.914 39.711,55.975 39.525,56.161 39.525,59.45 34.9,64.075 31.5,64.075 31.5,65.9 30.5,65.9
  region net 5V_TEMP: 7.49,67.875 7.795,67.875 7.795,70.624 9.744,72.574 9.744,75.604 11.217,75.604 11.217,77.356 11.192,77.382 5.858,77.382 5.833,77.407 5.833,72.261 7.49,70.604
  region net +3.3: 22.859,19 20.947,19 19.614,17.667 17.867,17.667 17.867,14.556 17.859,14.548 22.1,14.548 22.858,15.305
  region net 5V: 5.02,61.304 5.02,65.905 6.206,65.905 7.992,67.691 7.992,70.278 8.292,70.278 8.292,63.35 6.163,63.35 6.163,61.302
  region net 5V: 12.069,77.383 12.069,75.604 13.074,75.604 13.074,72.124 13.856,72.124 13.859,72.127 13.859,77.383
  region net 5V: 24.707,19 26.618,19 27.951,17.667 29.699,17.667 29.699,14.556 29.706,14.548 25.465,14.548 24.708,15.305
  region net 5V: 29.699,17.667 31.007,18.975 33.615,18.975 33.615,14.66 36.005,12.27 36.005,9.955 36.001,9.958 34.612,9.958 34.612,10.39 30.459,14.543 28.156,14.543
  region net 12V_EXP: 60.221,15.2 64.175,15.2 64.481,14.974 66.164,14.974 66.164,14.023 66.254,13.933 66.254,12.105 66.253,12.104 64.225,12.104 64.219,12.098 64.219,13.568 62.892,14.896 60.221,14.896
  region net NetC5_2: 43.838,15.488 44.427,15.488 46.073,17.134 46.941,18.002 46.941,19.322 46.093,19.322 46.093,18.489 44.225,17.012 43.863,17.012
  region net PROTECT_EMI: 1.2,1.2 1.204,1.197 1.956,1.197 1.216,1.936 1.202,1.936
  region net PROTECT_EMI: 83.8,1.2 83.803,1.204 83.803,1.956 83.064,1.216 83.064,1.202
  region net PROTECT_EMI: 83.8,83.8 83.796,83.803 83.044,83.803 83.784,83.064 83.798,83.064
  region net PROTECT_EMI: 1.2,83.8 1.197,83.796 1.197,83.044 1.936,83.784 1.936,83.798
  region net 12V: 50.415,16.259 50.971,15.703 50.971,14.218 52.433,14.218 52.975,13.676 52.975,12.52 52.978,12.517 54.827,12.517 57.878,12.517 59.762,14.4 62.621,14.396 62.621,14.705 59.762,14.705 57.929,15.992 55.008,15.992 54.568,16.432 54.568,18.118 53.079,18.118 52.608,17.646 50.429,17.646 50.429,16.273
  region net 12V: 52.1,14.2 52.082,14.218 50.971,14.218 50.429,13.675 50.429,9.029 49.8,8.4 43.164,8.4 42.449,9.115 42.449,11.624 43.334,11.624 43.334,9.801 49.244,9.801 49.244,16.461 50.429,17.646
  region net NetC5_1: 39.069,15.129 39.069,19.546 48.15,19.546 48.868,20.263 36.079,20.263 36.079,15.129
  region net NetC5_1: 43.813,10.078 48.976,10.078 48.976,20.263 47.649,20.263 47.649,18.485 48.297,17.837 48.297,12.987 46.937,11.627 43.813,11.627
Mid-Layer 1:
  rectangle net PROTECT_EMI: 1.016,81.839 3.048,84.15
  rectangle net PROTECT_EMI: 82.478,82.133 84.51,84.444
  rectangle net PROTECT_EMI: 0.515,0.345 2.547,2.657
  rectangle net PROTECT_EMI: 82.605,0.751 84.637,3.062
  region net PROTECT_EMI: 1.2,83.8 1.197,83.796 1.197,83.044 1.936,83.784 1.936,83.798
  region net PROTECT_EMI: 83.8,83.8 83.796,83.803 83.044,83.803 83.784,83.064 83.798,83.064
  region net PROTECT_EMI: 83.8,1.2 83.803,1.204 83.803,1.956 83.064,1.216 83.064,1.202
  region net PROTECT_EMI: 1.2,1.2 1.204,1.197 1.956,1.197 1.216,1.936 1.202,1.936
Mid-Layer 2:
  rectangle net PROTECT_EMI: 1.201,81.55 3.35,83.8
  rectangle net PROTECT_EMI: 0.774,0.441 2.924,2.69
  rectangle net PROTECT_EMI: 82.289,0.462 84.438,2.712
  rectangle net PROTECT_EMI: 82.31,82.184 84.46,84.434
  region net PROTECT_EMI: 1.2,83.8 1.197,83.796 1.197,83.044 1.936,83.784 1.936,83.798
  region net PROTECT_EMI: 83.8,83.8 83.796,83.803 83.044,83.803 83.784,83.064 83.798,83.064
  region net PROTECT_EMI: 83.8,1.2 83.803,1.204 83.803,1.956 83.064,1.216 83.064,1.202
  region net PROTECT_EMI: 1.2,1.2 1.204,1.197 1.956,1.197 1.216,1.936 1.202,1.936
Bottom Layer:
  region net NetD4_2: 18.241,31.186 18.241,32.575 21.533,32.575 21.533,34.303 19.08,34.317 19.08,36.198 24.157,36.192 24.157,33.951 24.157,31.186
  region net IR_LED_P: 11.944,38.071 7.633,38.071 7.633,36.881 11.944,36.881
  region net NetC123_1: 7.632,36.519 12.542,36.519 12.542,32.579 15.902,32.579 15.902,30.472 13.895,30.472 13.895,31.488 11.387,31.488 11.387,35.3 7.632,35.3
  region net PROTECT_EMI: 1.2,83.8 1.197,83.796 1.197,83.044 1.936,83.784 1.936,83.798
  region net PROTECT_EMI: 83.8,83.8 83.796,83.803 83.044,83.803 83.784,83.064 83.798,83.064
  region net PROTECT_EMI: 83.8,1.2 83.803,1.204 83.803,1.956 83.064,1.216 83.064,1.202
  region net PROTECT_EMI: 1.2,1.2 1.204,1.197 1.956,1.197 1.216,1.936 1.202,1.936

## Silkscreen, mask and mechanical layers (free items; w line width, h text height)
Top Overlay:
  text "SCL" at 2.402,48.733 h0.55 r270
  text "SDA" at 2.402,46.733 h0.55 r270
  text "VCC" at 2.388,44.733 h0.55 r270
  text "GND" at 2.411,42.733 h0.55 r270
  text "LED_P" at 2.529,39.104 h0.55 r270
  text "LED_N" at 2.529,35.846 h0.55 r270
  text "VCC" at 3.377,27.538 h0.55
  text "GND" at 3.325,25.016 h0.55
  text "5s/30s" at 17.53,22.73 h0.55
  text "SWDIO" at 2.855,22.493 h0.55
  text "SWCLK" at 2.905,19.971 h0.55
  text "NRST" at 3.144,17.448 h0.55
  text "RX" at 3.833,14.509 h0.55
  text "TX" at 3.757,11.907 h0.55
  text "GND" at 3.47,9.305 h0.55
Bottom Overlay:
  drawing of 19 lines, arcs and shapes, not listed
  text "EXP_V.1.2.1" at 48.896,77.236 h1.5
  text "G" at 2.531,18.788 h0.55 r90
  text "B" at 2.531,16.719 h0.55 r90
  text "3V3" at 2.531,15.2 h0.55 r90
  text "5V_T" at 2.49,13.378 h0.55 r90
  text "5V" at 2.531,10.786 h0.55 r90
  text "12V" at 2.531,8.946 h0.55 r90
Top Solder:
  region: 83.781,1.622 83.781,1.219 83.78,1.217 83.377,1.217
  region: 1.219,83.125 1.219,83.781 1.221,83.782 1.876,83.782
  region: 82.843,83.781 83.781,83.781 83.783,83.779 83.783,82.841
  region: 1.219,1.626 1.219,1.219 1.221,1.217 1.624,1.217 1.626,1.219
Bottom Solder:
  rectangle: 1.223,83.312 1.6,83.8
  rectangle: 1.086,1.2 1.956,1.6
  rectangle: 83.088,1.2 83.8,1.678
  rectangle: 83.287,83.363 83.804,83.803

## Text inside footprints (layer, text, board x,y; h text height)
U5: Top 3D Body "*" at 9.166,52.91 h1.27 r180
U6: Top 3D Body "*" at 21.104,52.91 h1.27 r180
U7: Top 3D Body "*" at 33.491,52.91 h1.27 r180
U8: Top 3D Body "*" at 45.342,52.91 h1.27 r180
U9: Bottom 3D Body "*" at 6.886,45.077 h0.64
U12: Top 3D Body "*" at 40.964,39.065 h1.27